# EAGLE board ENGI301_Maze_Project (EAGLE 8.7.1)
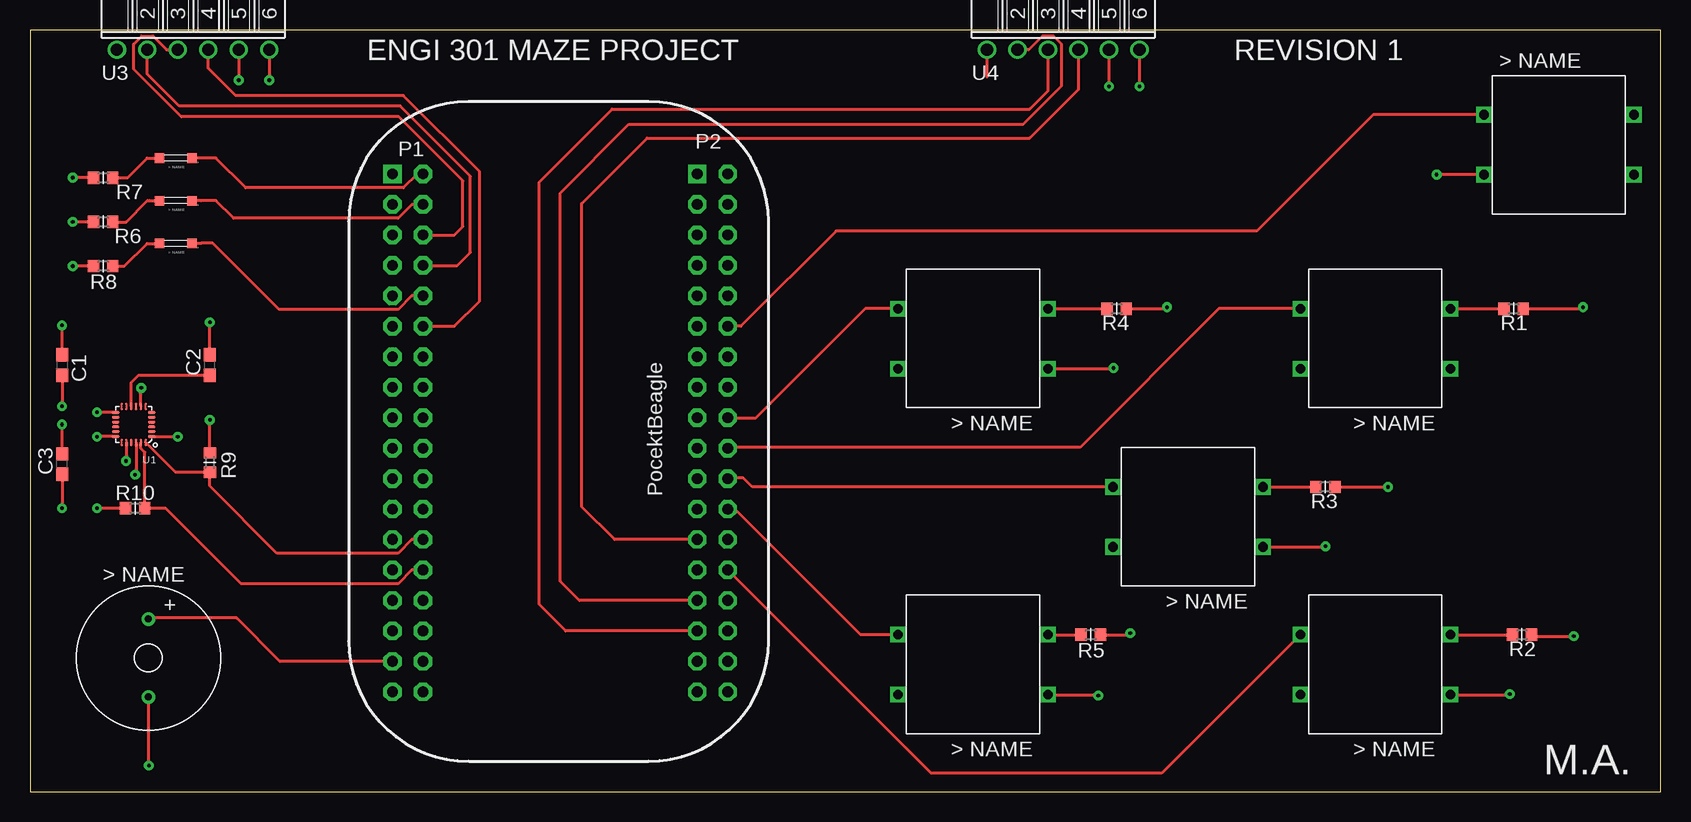
[diagram p0: board, top side]
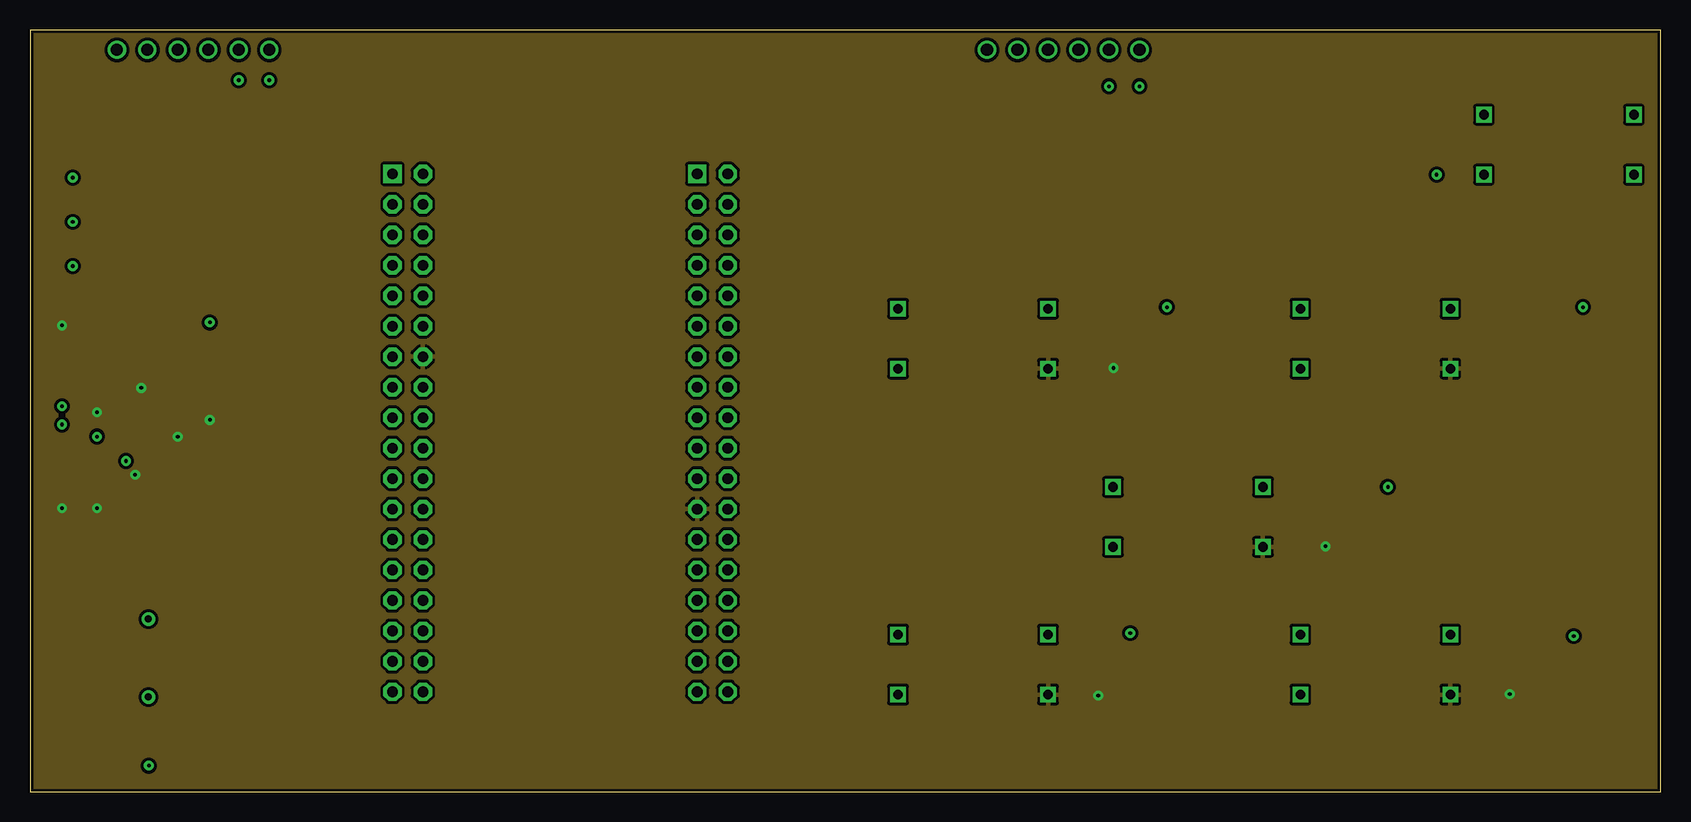
[diagram p1: board, inner layer Route2]
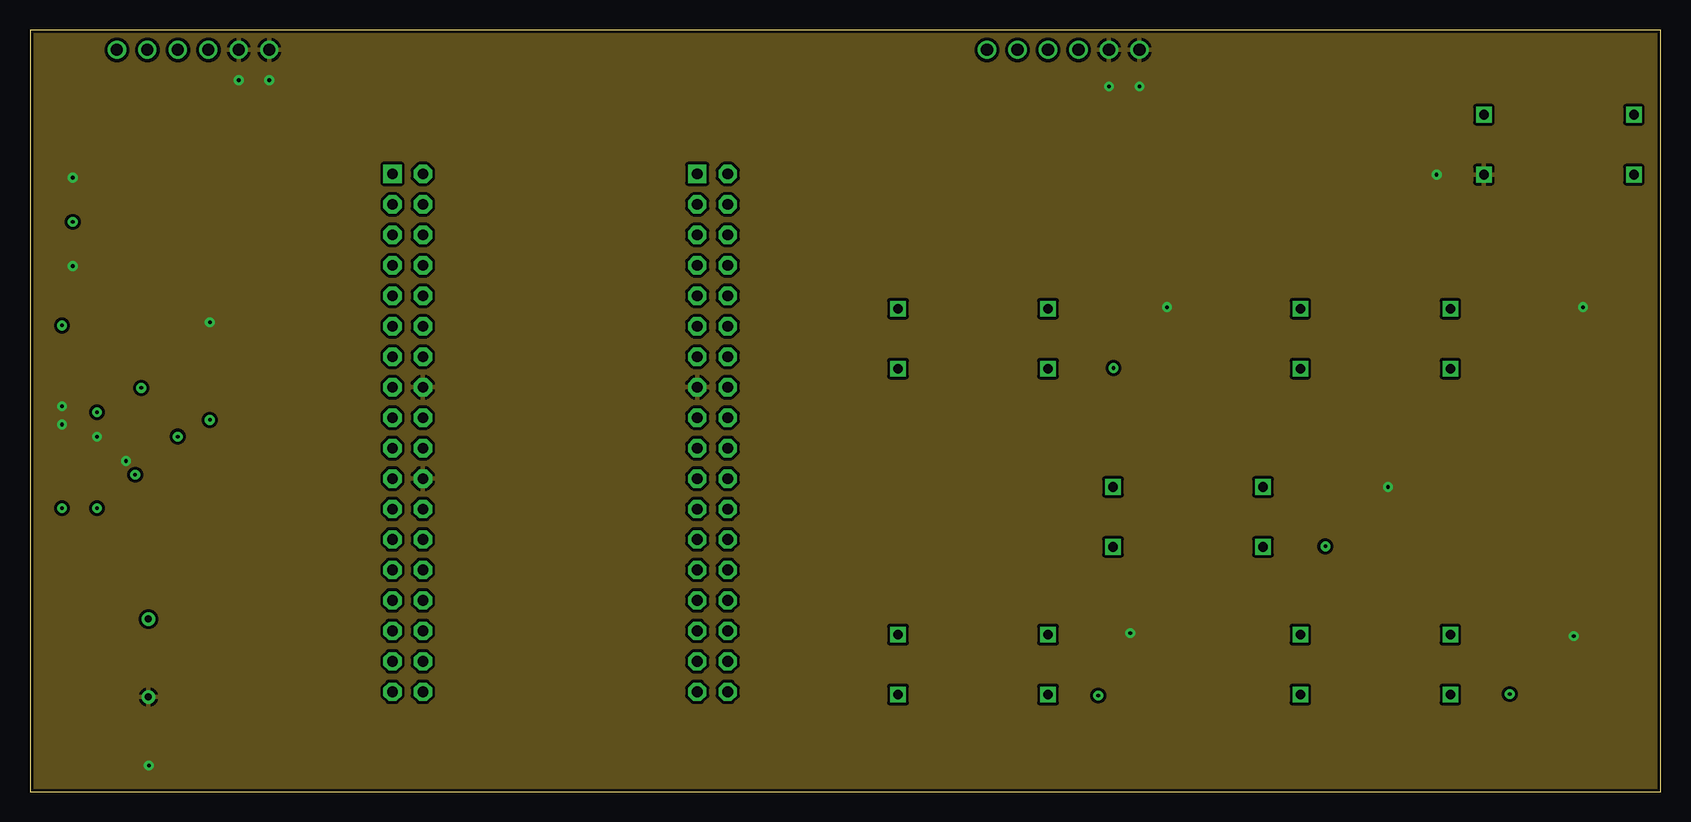
[diagram p2: board, inner layer Route15]
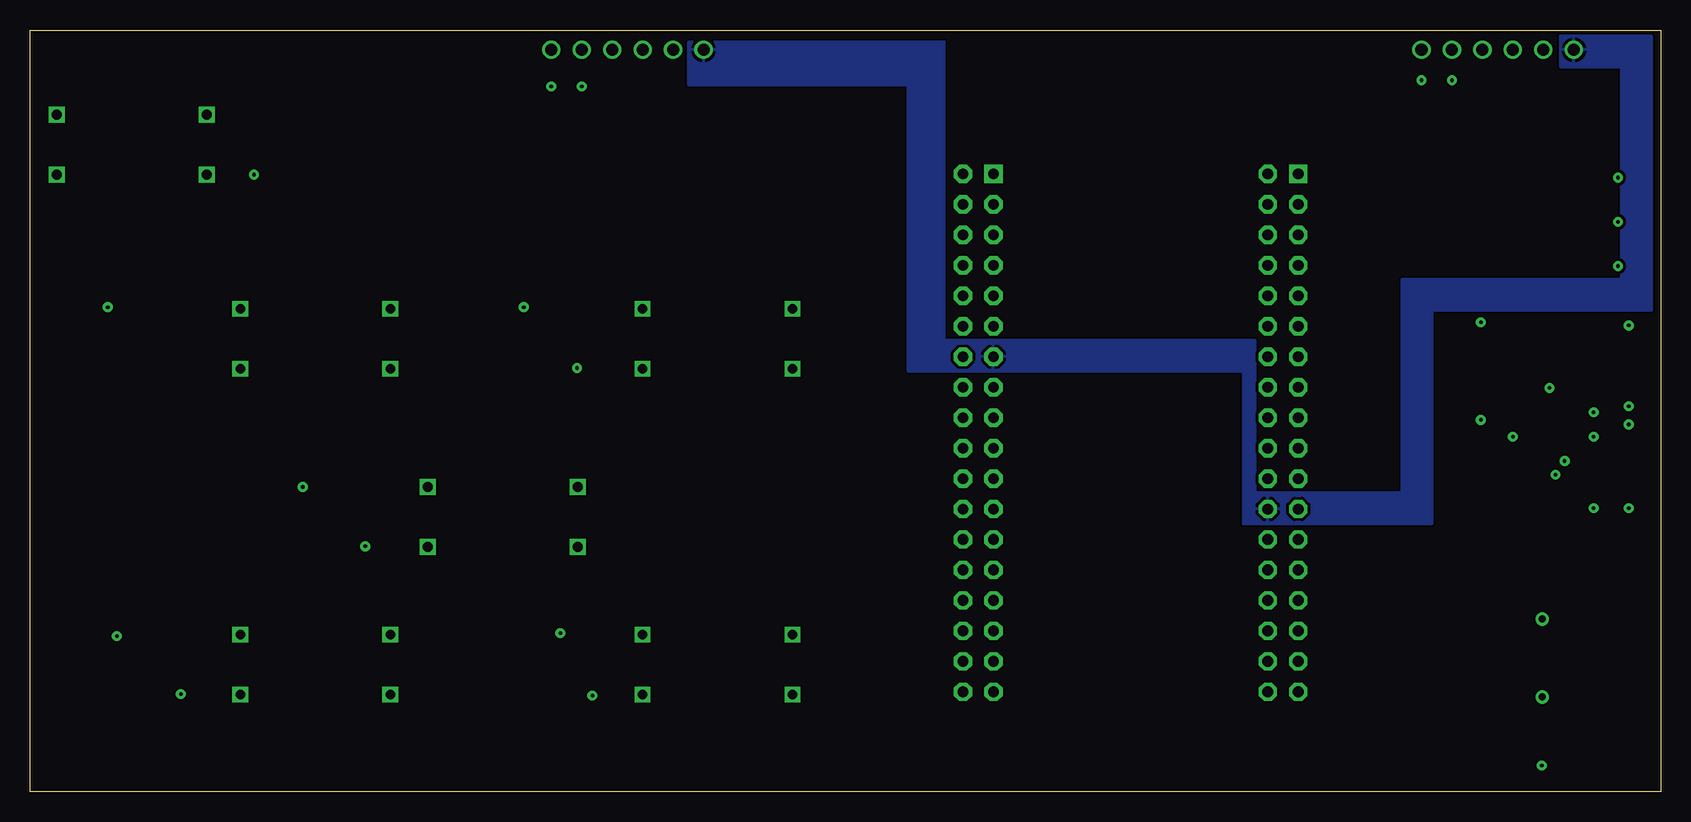
[diagram p3: board, bottom side, seen from below]

Size 135.89 x 63.5 mm. Coordinates in mm from the lower left corner, seen from the top.
Outline: 0,0 135.89,0 135.89,63.5 0,63.5 0,0
Copper layers (1*2*15*16): Top 0.035mm / dielectric 0.23mm / Route2 0.035mm / dielectric 0.93mm / Route15 0.035mm / dielectric 0.23mm / Bottom 0.035mm
Design rules "ENGI301_Maze_Project_4lyr": minimum track width 10mil, minimum drill 12mil, track to track 10mil, track to pad 10mil, pad to pad 10mil, via to via 10mil, smd to smd 10mil, copper to edge 10mil, drill to drill 12mil, minimum pad ring 10mil, minimum via ring 10mil, stop-mask expansion 3mil, vias tented up to drill 25mil, thermal gap 10mil

## Footprints (pad centres in the part's own frame; a part is rotated, then mirrored left to right if it is on the bottom)
C0603 = smd 1.1 x 1: 1 -0.85,0; 2 0.85,0
LTST-C191TBKT = smd 0.8 x 0.8: 1 -0.8,0.4; 2 1.9,0.4
R0603 = smd 0.95 x 1.031: 1 -0.8,0; 2 0.8,0
TACTILE-BUTTON = drill 0.8 square: 1 0,5; 2 12.5,5; 3 0,0; 4 12.5,0
QFN3MMX3MM = smd 0.6 x 0.2: 1 -1.5,1; 2 -1.5,0.6; 3 -1.5,0.2; 4 -1.5,-0.2; 5 -1.5,-0.6; 6 -1.5,-1; 13 1.5,-1; 14 1.5,-0.6; 15 1.5,-0.2; 16 1.5,0.2; 17 1.5,0.6; 18 1.5,1 | smd 0.2 x 0.6: 7 -1,-1.5; 8 -0.6,-1.5; 9 -0.2,-1.5; 10 0.2,-1.5; 11 0.6,-1.5; 12 1,-1.5; 19 1,1.5; 20 0.6,1.5; 21 0.2,1.5; 22 -0.2,1.5; 23 -0.6,1.5; 24 -1,1.5
FE06W = drill 1.016: 1 -6.35,0; 2 -3.81,0; 3 -1.27,0; 4 1.27,0; 5 3.81,0; 6 6.35,0
CEM-1203 = drill 0.6: + 0,3.25; - 0,-3.25
POCKETBEAGLE = drill 0.889 pad 1.524 square: 1 5.91,3.53; 37 5.91,28.93 | drill 0.889 pad 1.524 octagon: 2 5.91,6.07; 3 8.45,3.53; 4 8.45,6.07; 5 10.99,3.53; 6 10.99,6.07; 7 13.53,3.53; 8 13.53,6.07; 9 16.07,3.53; 10 16.07,6.07; 11 18.61,3.53; 12 18.61,6.07; 13 21.15,3.53; 14 21.15,6.07; 15 23.69,3.53; 16 23.69,6.07; 17 26.23,3.53; 18 26.23,6.07; 19 28.77,3.53; 20 28.77,6.07; 21 31.31,3.53; 22 31.31,6.07; 23 33.85,3.53; 24 33.85,6.07; 25 36.39,3.53; 26 36.39,6.07; 27 38.93,3.53; 28 38.93,6.07; 29 41.47,3.53; 30 41.47,6.07; 31 44.01,3.53; 32 44.01,6.07; 33 46.55,3.53; 34 46.55,6.07; 35 49.09,3.53; 36 49.09,6.07; 38 5.91,31.47; 39 8.45,28.93; 40 8.45,31.47; 41 10.99,28.93; 42 10.99,31.47; 43 13.53,28.93; 44 13.53,31.47; 45 16.07,28.93; 46 16.07,31.47; 47 18.61,28.93; 48 18.61,31.47; 49 21.15,28.93; 50 21.15,31.47; 51 23.69,28.93; 52 23.69,31.47; 53 26.23,28.93; 54 26.23,31.47; 55 28.77,28.93; 56 28.77,31.47; 57 31.31,28.93; 58 31.31,31.47; 59 33.85,28.93; 60 33.85,31.47; 61 36.39,28.93; 62 36.39,31.47; 63 38.93,28.93; 64 38.93,31.47; 65 41.47,28.93; 66 41.47,31.47; 67 44.01,28.93; 68 44.01,31.47; 69 46.55,28.93; 70 46.55,31.47; 71 49.09,28.93; 72 49.09,31.47

## Placement (x,y rotation side)
C1  10 nF  [C0603]  2.67,35.56 270 top
C2  0.1 uF  [C0603]  14.99,35.56 90 top
C3  0.1 uF  [C0603]  2.67,27.3 90 top
D$1  LTST-C191TBKT  [LTST-C191TBKT]  12.7,53.21 180 top
D$2  LTST-C191TBKT  [LTST-C191TBKT]  12.7,49.66 180 top
D$3  LTST-C191TBKT  [LTST-C191TBKT]  12.7,46.1 180 top
R1  1K  [R0603]  123.63,40.26 180 top
R2  1K  [R0603]  124.33,13.08 180 top
R3  1K  [R0603]  107.95,25.4 180 top
R4  1K  [R0603]  90.55,40.26 180 top
R5  1K  [R0603]  88.39,13.08 180 top
R6  1K  [R0603]  6.1,47.5 180 top
R7  1K  [R0603]  6.1,51.18 180 top
R8  1K  [R0603]  6.1,43.81 180 top
R9  2.2K  [R0603]  14.99,27.43 270 top
R10  2.2K  [R0603]  8.76,23.62 0 top
SW$1  TACTILE-BUTTON  [TACTILE-BUTTON]  118.36,40.26 180 top
SW$2  TACTILE-BUTTON  [TACTILE-BUTTON]  84.84,13.08 180 top
SW$3  TACTILE-BUTTON  [TACTILE-BUTTON]  102.74,25.4 180 top
SW$4  TACTILE-BUTTON  [TACTILE-BUTTON]  84.84,40.26 180 top
SW$5  TACTILE-BUTTON  [TACTILE-BUTTON]  118.36,13.08 180 top
SW$6  TACTILE-BUTTON  [TACTILE-BUTTON]  121.16,51.44 0 top
U1  [QFN3MMX3MM]  8.64,30.61 180 top
U3  MOD-LED8X8RGB-CONN  [FE06W]  13.59,61.85 0 top
U4  MOD-LED8X8RGB-CONN  [FE06W]  86.11,61.85 0 top
U5  CEM-1203  [CEM-1203]  9.87,11.13 0 top
U7  POCKETBEAGLE  [POCKETBEAGLE]  26.67,57.4 270 top

## Library data of the parts
C1-C3 D$1-D$3 R1-R10 SW$1-SW$6 U1 U3-U5 U7 = 3-29-2018 Class

## Nets
GND: C1.2 C2.2 C3.2 R1.1 R2.1 R3.1 R4.1 R5.1 R7.2 R8.2 SW$6.3 U1.18 U1.20 U3.5 U3.6 U4.5 U4.6 U5.- U7.16 U7.22 U7.51
GPIO3(LED3): D$3.1 U7.10
GPIO46(BT3): SW$3.4 U7.58
GPIO47(BT4): SW$4.4 U7.54
GPIO48(BT2): SW$2.4 U7.60
GPIO64(BT1): SW$1.4 U7.56
GPIO87(LED1): D$1.1 U7.2
GPIO88(LED3): U7.35
GPIO89(LED2): D$2.1 U7.4
GPIO124(BT5): SW$5.4 U7.64
I2C2.SCL: R10.2 U1.23 U7.28
I2C2.SDA: R9.2 U1.24 U7.26
MPU_INT: U1.12
N$1: R5.2 SW$2.3
N$2: R4.2 SW$4.3
N$3: R3.2 SW$3.3
N$4: R2.2 SW$5.3
N$5: R1.2 SW$1.3
N$8: D$1.2 R7.1
N$9: D$2.2 R6.1
N$10: R6.2
N$14: D$3.2 R8.1
N$15: SW$6.1 U7.48
N$16: U7.57
N$18: U7.15
N$19: U5.+ U7.33
N$25: C2.1 U1.10
SPI0.CLK(LEDARRAY1): U3.2 U7.8
SPI0.CS(LEDARRAY1): U3.3 U7.6
SPI0.MOSI(LEDARRAY1): U3.4 U7.12
SPI1.CLK(LEDA2): U4.2 U7.65
SPI1.CS(LEDA2): U4.3 U7.67
SPI1.MOSI(LEDA2): U4.4 U7.61
SYS_VDD1_3P3V: C1.1 C3.1 R9.1 R10.1 SW$1.1 SW$2.1 SW$3.1 SW$4.1 SW$5.1 U1.1 U1.8 U1.13 U1.22 U7.14 U7.59
SYS_VDD1_5V: U3.1 U4.1 U7.24 U7.49

## Tracks (layer width: path | path; a pad name or v marks a point on that pad's centre or on a via)
GND  (via drill 0.3 pad 0.61)
  Top 0.254: 9.91,7.84 arc90 U5.- 9.87,2.2 v9.91,2.16 | R5.1 91.57,13.08 v91.69,13.21 | U4.6 v92.46,58.8 | SW$6.3 v117.22,51.44 | C1.2 v2.67,32.13 | C3.2 v2.67,30.61 | C2.2 v14.99,39.12 | U1.20 8.04,27.59 v8,27.56 | U1.18 5.6,29.61 v5.59,29.59 | R7.2 v3.56,51.18 | R8.2 v3.56,43.81 | R3.1 v113.16,25.4 | R4.1 94.62,40.26 v94.74,40.39 | R2.1 125.26,12.95 v128.65,12.95 | R1.1 129.29,40.26 v129.41,40.39 | U3.5 v17.4,59.31 | U4.5 v89.92,58.8 | U3.6 v19.94,59.31
  pour Route15: -1.33,-1.33 137.22,-1.33 137.22,64.83 -1.33,64.83
GPIO3(LED3)
  Top 0.254: U7.10 31.82,41.33 30.67,40.19 20.77,40.19 15.24,45.72 14.28,45.72 14.26,45.7 D$3.1
GPIO46(BT3)
  Top 0.254: SW$3.4 60.2,25.4 59.44,26.16 58.21,26.16 U7.58
GPIO47(BT4)
  Top 0.254: SW$4.4 69.6,40.26 60.45,31.11 58.2,31.11 U7.54
GPIO48(BT2)
  Top 0.254: SW$2.4 69.22,13.08 58.74,23.55 U7.60
GPIO64(BT1)
  Top 0.254: SW$1.4 99.06,40.26 87.5,28.7 58.21,28.7 U7.56
GPIO87(LED1)
  Top 0.254: D$1.1 13.46,52.81 | D$1.1 13.46,52.81 | D$1.1 13.46,52.82 | U7.2 32.26,51.49 31.12,50.35 17.97,50.35 15.49,52.83 14.28,52.83 14.26,52.81 D$1.1
GPIO89(LED2)
  Top 0.254: U7.4 31.82,48.95 30.67,47.81 16.96,47.81 15.49,49.28 14.28,49.28 14.26,49.26 D$2.1
GPIO124(BT5)
  Top 0.254: SW$5.4 94.31,1.52 75.09,1.52 U7.64
I2C2.SCL
  Top 0.254: U7.28 31.82,18.47 30.67,17.33 17.59,17.33 11.3,23.62 R10.2 9.56,28.29 9.24,28.61 U1.23
I2C2.SDA
  Top 0.254: U7.26 31.82,21.01 30.67,19.87 20.58,19.87 14.99,25.46 R9.2 12.11,26.63 U1.24
N$1
  Top 0.254: SW$2.3 R5.2
N$2
  Top 0.254: SW$4.3 R4.2
N$3
  Top 0.254: SW$3.3 R3.2
N$4
  Top 0.254: SW$5.3 R2.2
N$5
  Top 0.254: SW$1.3 R1.2
N$8
  Top 0.254: R7.1 8.13,51.18 9.76,52.81 D$1.2
N$9
  Top 0.254: R6.1 8,47.5 9.78,49.28 | 9.78,49.28 9.96,49.28 | 9.78,49.28 9.8,49.26 D$2.2
N$10  (via drill 0.3 pad 0.61)
  Top 0.254: R6.2 v3.56,47.5
N$14
  Top 0.254: R8.1 7.87,43.81 9.76,45.7 D$3.2
N$15
  Top 0.254: SW$6.1 111.93,56.44 102.23,46.74 67.18,46.74 59.24,38.79 U7.48
N$19
  Top 0.254: U7.33 20.83,10.85 17.21,14.48 9.96,14.48 U5.+
N$25
  Top 0.254: U1.10 8.44,34.09 9.06,34.71 C2.1
SPI0.CLK(LEDARRAY1)
  Top 0.254: U7.8 35.62,43.87 36.7,44.96 36.7,51.31 30.86,57.15 12.45,57.15 9.78,59.82 U3.2
SPI0.CS(LEDARRAY1)
  Top 0.254: U7.6 35.36,46.41 36.07,47.12 36.07,50.93 30.73,56.26 12.62,56.26 8.64,60.24 8.64,62.32 9.31,62.99 10.25,62.99 11.39,61.85 U3.3
SPI0.MOSI(LEDARRAY1)
  Top 0.254: U7.12 35.36,38.79 37.47,40.89 37.47,51.69 31.11,58.04 17.14,58.04 14.86,60.33 U3.4
SPI1.CLK(LEDA2)
  Top 0.254: U7.65 45.79,15.93 44.2,17.53 44.2,49.91 49.91,55.63 82.76,55.63 85.98,58.84 85.98,62.32 85.31,62.99 84.36,62.99 83.22,61.85 U4.2
SPI1.CS(LEDA2)
  Top 0.254: U7.67 44.65,13.39 42.42,15.62 42.42,50.8 48.51,56.9 83.31,56.9 84.84,58.42 U4.3
SPI1.MOSI(LEDA2)
  Top 0.254: U7.61 48.71,21.01 45.97,23.75 45.97,49.02 51.44,54.48 83.31,54.48 87.38,58.55 U4.4
SYS_VDD1_3P3V  (via drill 0.3 pad 0.61)
  Top 0.254: SW$3.1 107.9,20.4 v107.95,20.45 | SW$5.1 123.27,8.08 v123.32,8.13 | R10.1 v5.59,23.62 | C3.1 v2.67,23.62 | R9.1 v14.99,30.99 | U1.22 8.84,26.49 v8.76,26.42 | U1.1 12.3,29.61 v12.32,29.59 | U1.8 9.24,33.62 v9.27,33.66 | U1.13 5.6,31.61 v5.59,31.62 | SW$2.1 88.95,8.08 v89.03,8 | SW$4.1 90.25,35.26 v90.3,35.31 | C1.1 v2.67,38.86
  pour Route2: -0.57,-0.57 136.46,-0.57 136.46,64.07 -0.57,64.07
SYS_VDD1_5V
  Top 0.254: 79.76,59.56 U4.1
  pour Bottom: 78.49,62.48 81.03,62.48 81.03,58.93 62.74,58.93 62.74,35.05 35.31,35.05 34.8,35.05 34.8,33.53 34.8,22.35 19.56,22.35 19.05,22.35 19.05,40.13 0.76,40.13 0.76,41.15 0.76,62.99 8.38,62.99 8.38,60.45 3.3,60.45 3.3,42.67 21.59,42.67 21.59,24.89 33.78,24.89 33.78,37.59 59.69,37.59 59.69,62.48

## Text on the board
tNames: ENGI 301 MAZE PROJECT | REVISION 1 | M.A.